# Altium PCB RelayController.PcbDoc
Units mm, origin at the board's own origin, x right, y up, seen from the top; angles counter-clockwise.
Board outline 98.68 x 98.43 mm, 2 copper layers (Top Layer, Bottom Layer); 52 components, 65 nets, 204 pads, 43 vias.
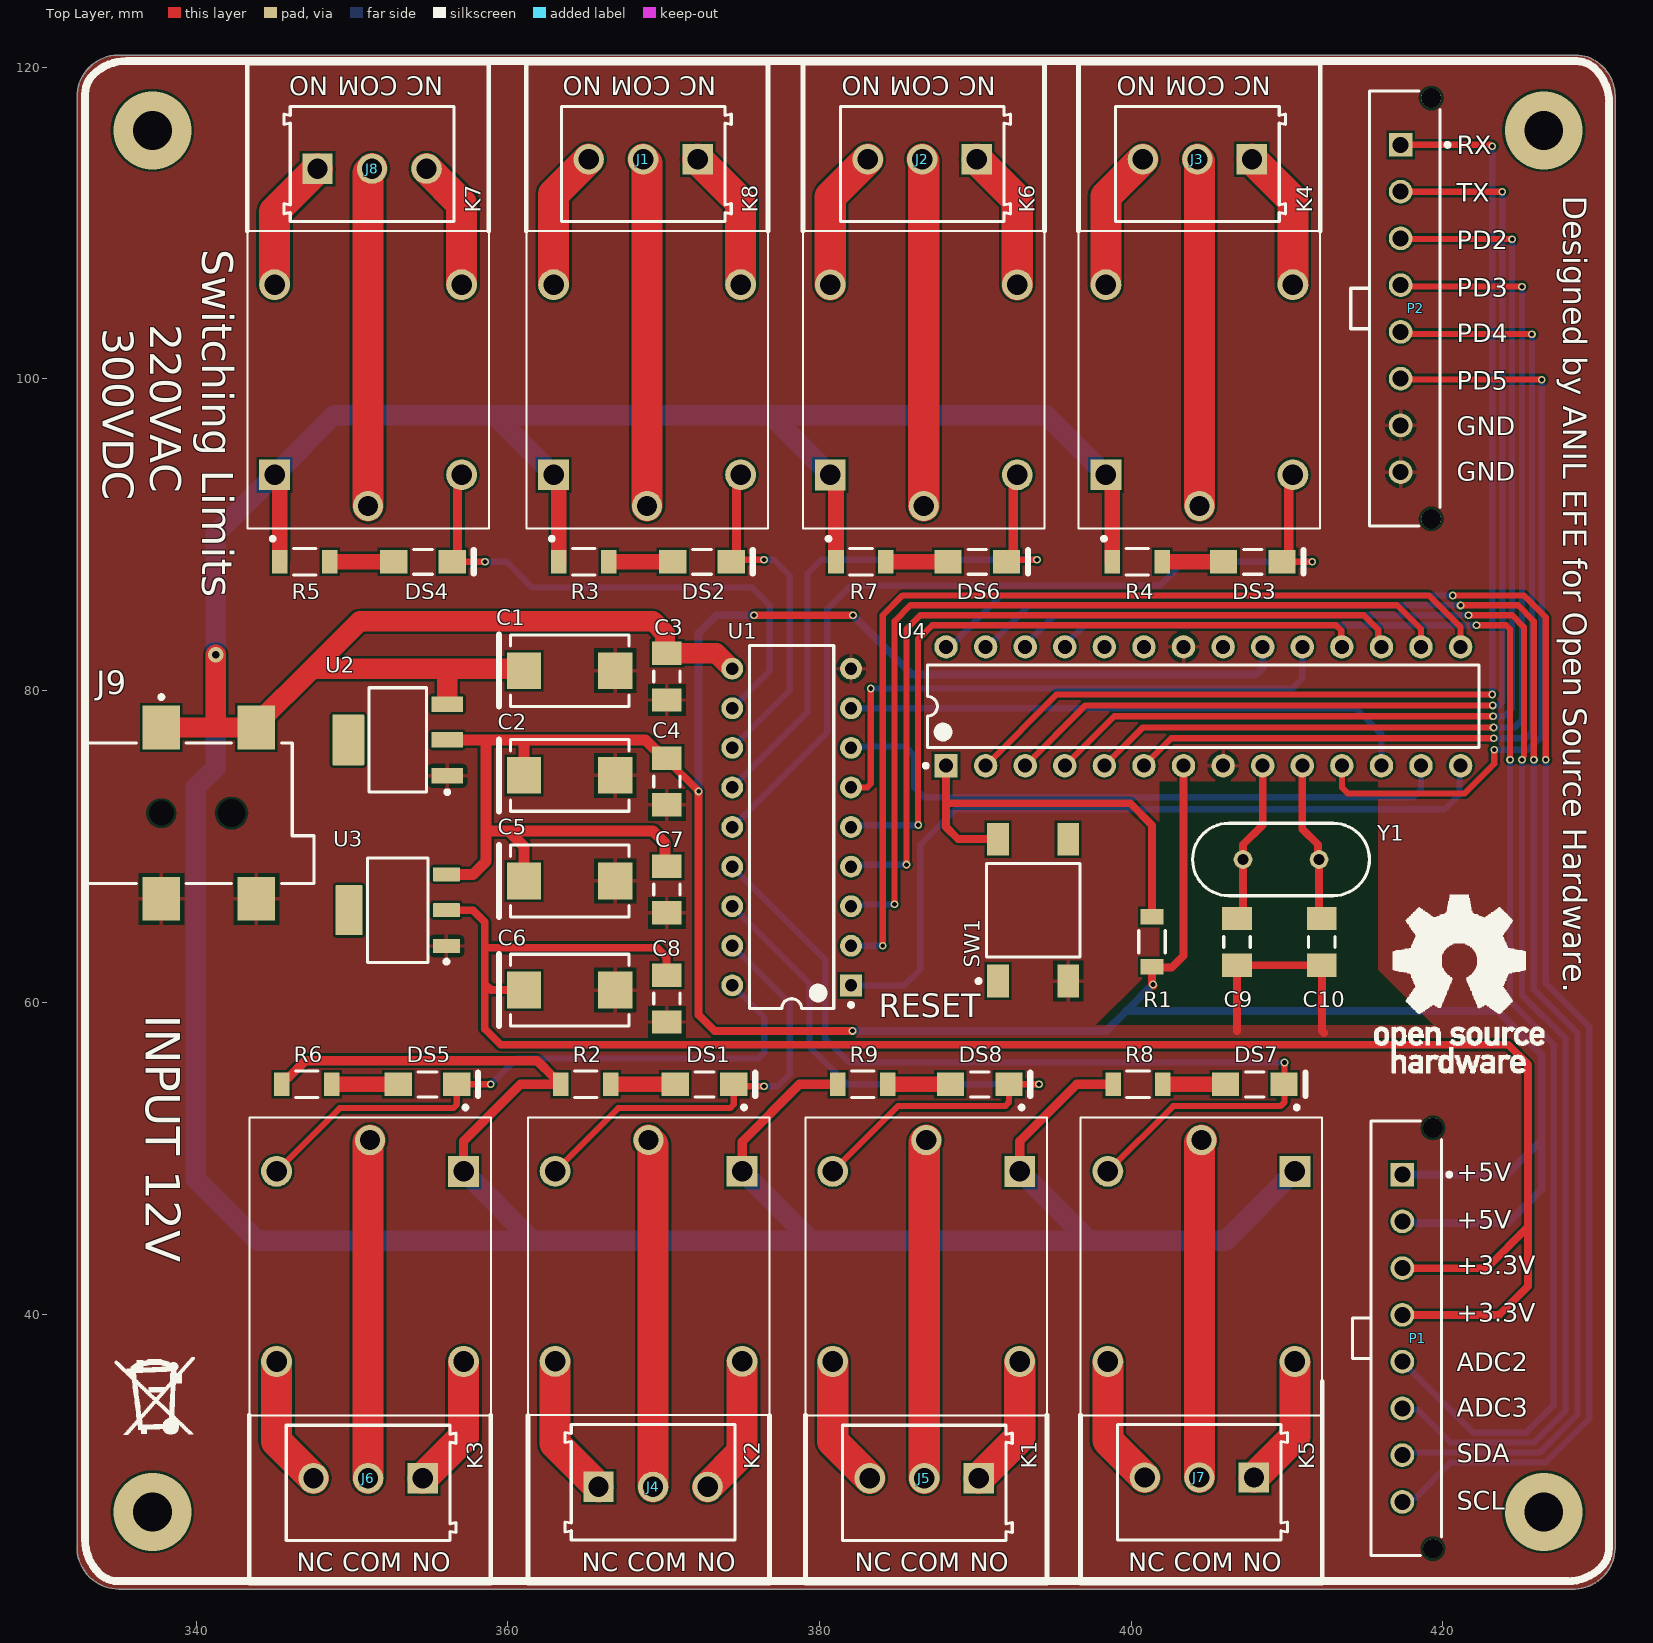
[diagram p0: Top Layer view]
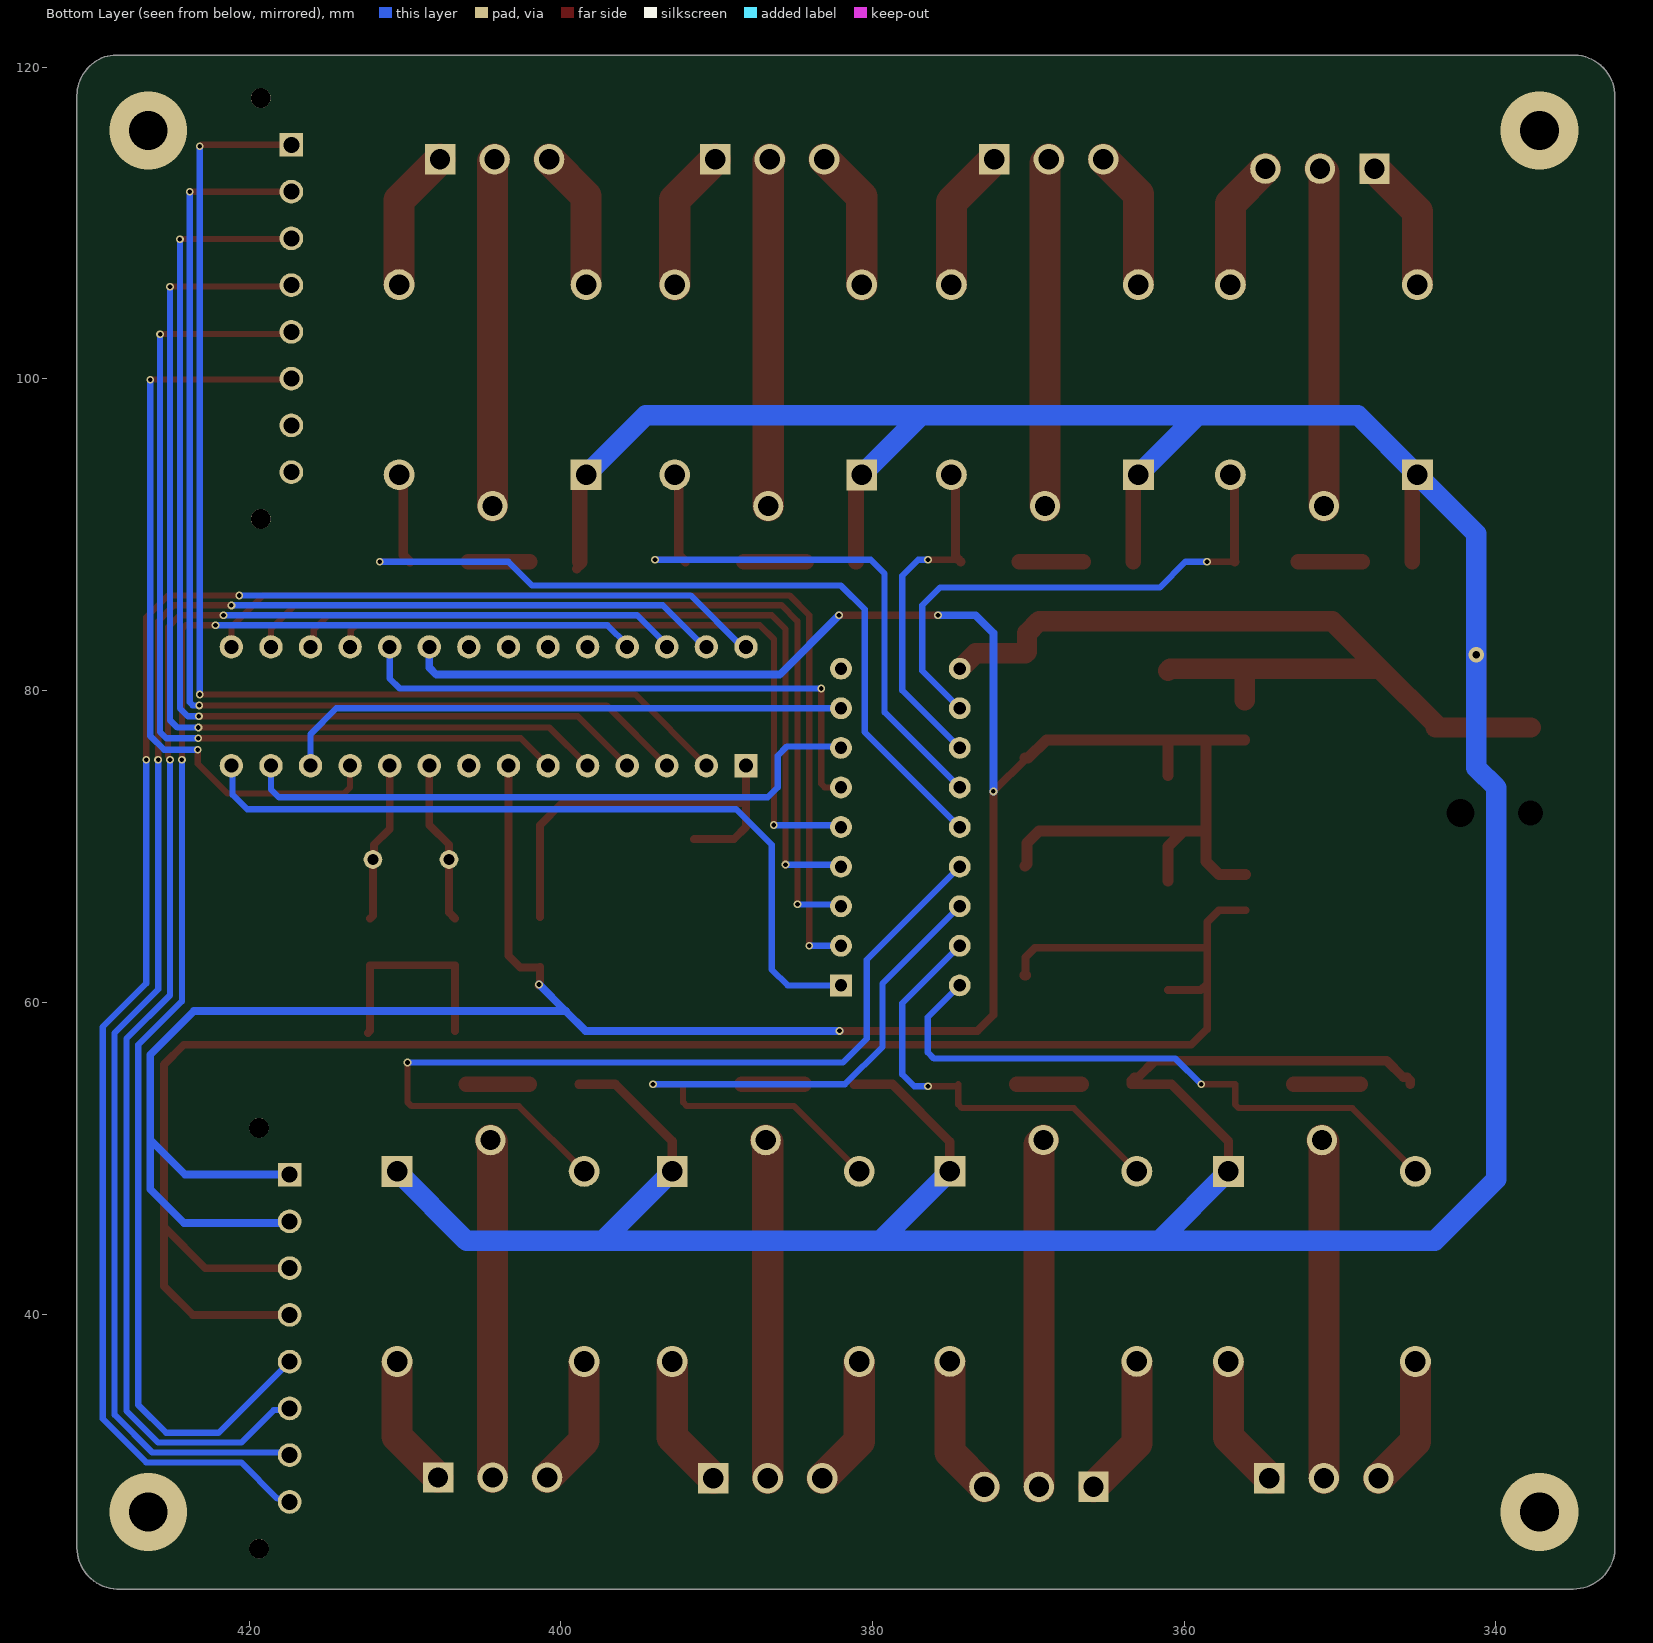
[diagram p1: Bottom Layer view, seen from below]
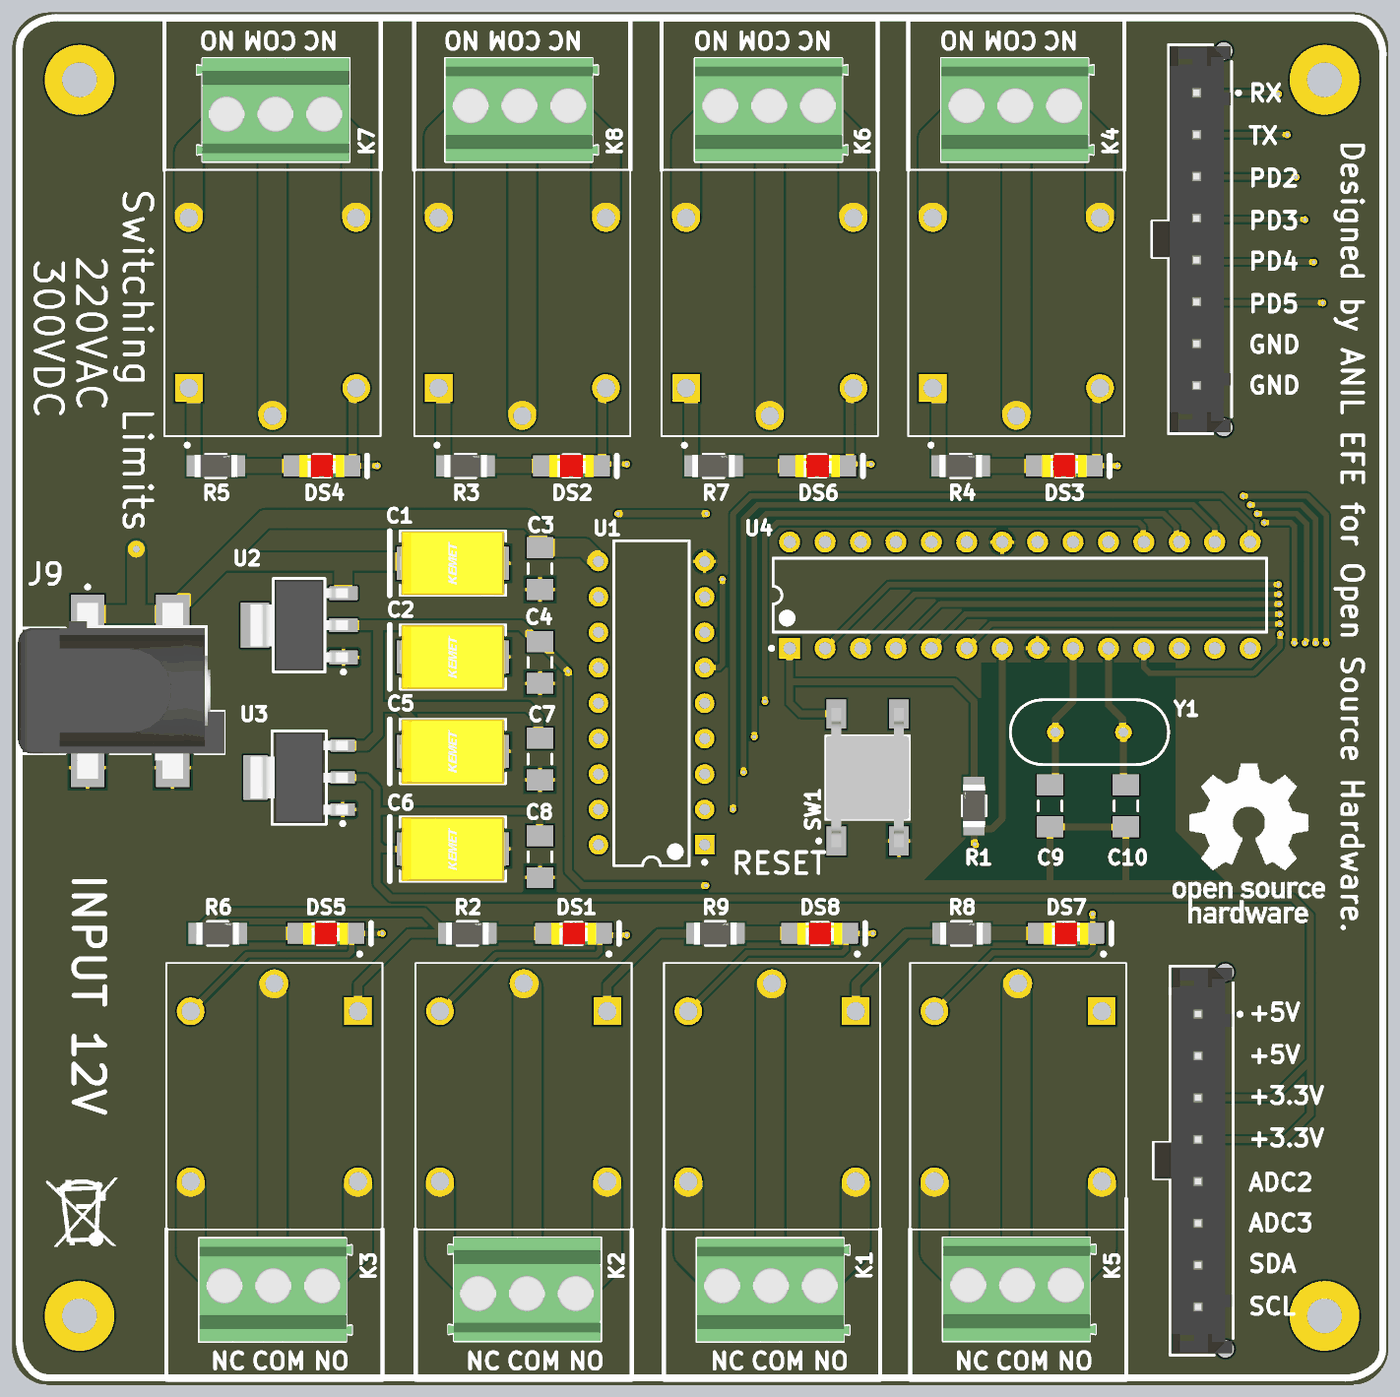
[diagram p2: 3D render of the assembled board from above, using the file's embedded part models]

## Layer stack, top to bottom
Top Solder: solder mask 0.0102, Solder Resist, Dk 3.5
Top Layer: signal copper 0.0356
Dielectric 1: dielectric 0.32, FR-4, Dk 4.8
Bottom Layer: signal copper 0.0356
Bottom Solder: solder mask 0.0102, Solder Resist, Dk 3.5

## Board outline
332.359,25.149 ccw(c335.026,25.022) 335.026,22.352 428.244,22.352 ccw(c428.371,25.016) 431.038,25.016 431.038,118.175 ccw(c428.436,118.175) 430.276,120.015 430.205,120.086 ccw(c428.537,118.418) 428.537,120.777 335.153,120.777 ccw(c335.026,118.11) 332.356,118.11 332.359,118.11

## Design rules (kind name [scope] priority, off if disabled: settings)
Clearance [All] p1: gap=0.15 ignorepadtopadclearanceinfootprint=FALSE
ComponentClearance [All] p1: gap=0 collisioncheckmode=3 verticalgap=0 showdistances=FALSE
PolygonConnect [All] p1: connectstyle=Relief reliefconductorwidth=0.254 reliefentries=4 polygonreliefangle="90 Angle" airgapwidth=0.254
RoutingVias [All] p1: holewidth=0.711 width=1.27 viastyle="Through Hole" minholewidth=0.711 minwidth=1.27 maxholewidth=0.711 maxwidth=1.27
SolderMaskExpansion [All] p1: expansion=0.102 istentingtop=FALSE
Width [All] p1: maxlimit=5 minlimit=0.254 preferedwidth=0.254 minimp=50.000000 maximp=50.000000 favimp=50.000000
29 further rules are at their usual default settings.

## Components (designator, comment, footprint, x,y, rotation, side; value= is the part's Value field where it differs from the comment)
C1 "22uF_TANT" KEMT-T491-D_L 363.958,81.281 r0 top
C2 "22uF_TANT" KEMT-T491-D_L 363.958,74.56 r0 top
C3 "100N" KEMT-1206-2_M 370.205,80.899 r90 top
C4 "100N" KEMT-1206-2_M 370.205,74.168 r90 top
C5 "22uF_TANT" KEMT-T491-D_L 363.958,67.786 r0 top
C6 "22uF_TANT" KEMT-T491-D_L 363.958,60.788 r0 top
C7 "100N" KEMT-1206-2_M 370.205,67.236 r90 top
C8 "100N" KEMT-1206-2_M 370.205,60.238 r90 top
C9 "22pF" KEMT-1206-2_M 406.781,63.881 r90 top
C10 "22pF" KEMT-1206-2_M 412.228,63.881 r90 top
DS1 "GREEN" KING-APTD3216CGCK_V 372.618,54.737 r0 top
DS2 "GREEN" KING-APTD3216CGCK_V 372.461,88.265 r0 top
DS3 "GREEN" KING-APTD3216CGCK_V 407.797,88.265 r0 top
DS4 "GREEN" KING-APTD3216CGCK_V 354.557,88.265 r0 top
DS5 "GREEN" KING-APTD3216CGCK_V 354.838,54.737 r0 top
DS6 "GREEN" KING-APTD3216CGCK_V 390.114,88.265 r0 top
DS7 "GREEN" KING-APTD3216CGCK_V 407.924,54.737 r0 top
DS8 "GREEN" KING-APTD3216CGCK_V 390.271,54.737 r0 top
J1 "691214110003" 691214110003 368.681,113.792 r180 top
J2 "691214110003" 691214110003 386.588,113.792 r180 top
J3 "3POS TERMINAL 3.5MM" 691214110003 404.241,113.792 r180 top
J4 "691214110003" 691214110003 369.316,29.21 r0 top
J5 "691214110003" 691214110003 386.715,29.164 r180 top
J6 "3POS TERMINAL 3.5MM" 691214110003 351.028,29.164 r180 top
J7 "691214110003" 691214110003 404.368,29.21 r180 top
J8 "691214110003" 691214110003 351.282,113.792 r0 top
J9 "BARREL JACK" CUI-PJ-002AH-4_V 340.165,72.136 r0 top
K1 "SRD-05VDC-SL-C" RELAY_SRD-05VDC-SL-C 386.842,43.053 r270 top
K2 "SRD-05VDC-SL-C" RELAY_SRD-05VDC-SL-C 369.031,43.057 r270 top
K3 "SRD-05VDC-SL-C" RELAY_SRD-05VDC-SL-C 351.155,43.053 r270 top
K4 "" RELAY_SRD-05VDC-SL-C 404.368,99.949 r90 top
K5 "SRD-05VDC-SL-C" RELAY_SRD-05VDC-SL-C 404.495,43.053 r270 top
K6 "SRD-05VDC-SL-C" RELAY_SRD-05VDC-SL-C 386.684,99.945 r90 top
K7 "SRD-05VDC-SL-C" RELAY_SRD-05VDC-SL-C 351.028,99.949 r90 top
K8 "SRD-05VDC-SL-C" RELAY_SRD-05VDC-SL-C 368.935,99.949 r90 top
P1 "66200811122" 66200811122 417.649,38.443 r90 top
P2 "66200811122" 66200811122 417.541,104.519 r90 top
R1 "10K" FP-RC1206-MFG 401.331,63.881 r90 top value=0Ω
R2 "820R" FP-RC1206-MFG 364.998,54.737 r0 top value=0Ω
R3 "820R" FP-RC1206-MFG 364.871,88.265 r0 top value=0Ω
R4 "820R" FP-RC1206-MFG 400.38,88.265 r0 top value=0Ω
R5 "820R" FP-RC1206-MFG 346.964,88.265 r0 top value=0Ω
R6 "820R" FP-RC1206-MFG 347.091,54.737 r0 top value=0Ω
R7 "820R" FP-RC1206-MFG 382.651,88.265 r0 top value=0Ω
R8 "820R" FP-RC1206-MFG 400.431,54.737 r0 top value=0Ω
R9 "820R" FP-RC1206-MFG 382.778,54.737 r0 top value=0Ω
SW1 "BUTTON" TECO-FSM4JSMATR_V 393.7,65.913 r180 top
U1 "ULN2803A" STM-DIP-18 378.206,71.247 r180 top
U2 "LM1117-5.0" DCY0004A_M 352.933,76.835 r180 top
U3 "LM1117IMP-3.3" DCY0004A_N 352.933,65.913 r180 top
U4 "ATmega328P-PU" 28P3 404.622,78.994 r90 top
Y1 "16MHZ" FOX-FOXSLF-2_V 409.609,69.165 r0 top

## Footprints (in the part's own frame and the unit in brackets; to place one, negate y for a bottom-side part, rotate by r counter-clockwise, add the part's x,y. Pads: shape width x height; smd on the part's side, far side on the other; paste and mask are expansions set on the pad)
28P3 [mm] "28-Pin Plastic Dual In-Line Package (PDIP)"
  rect 1.5x1.5 hole 0.9: 1(-3.81,16.51)
  round 1.5 hole 0.9: 2(-3.81,13.97) 3(-3.81,11.43) 4(-3.81,8.89) 5(-3.81,6.35) 6(-3.81,3.81) 7(-3.81,1.27) 8(-3.81,-1.27) 9(-3.81,-3.81) 10(-3.81,-6.35) 11(-3.81,-8.89) 12(-3.81,-11.43) 13(-3.81,-13.97) 14(-3.81,-16.51) 15(3.81,-16.51) 16(3.81,-13.97) 17(3.81,-11.43) 18(3.81,-8.89) 19(3.81,-6.35) 20(3.81,-3.81) 21(3.81,-1.27) 22(3.81,1.27) 23(3.81,3.81) 24(3.81,6.35) 25(3.81,8.89) 26(3.81,11.43) 27(3.81,13.97) 28(3.81,16.51)
  silkscreen extent -3.93,-17.7 2.65,17.93, body extent -3.6,-17.65 3.6,17.65, height 4.58
66200811122 [mm] "3.00mm Male Single Row Vertical Header, 8p"
  rect 1.52x1.52 hole 1.02: 1(10.5,0.255)
  round 1.52 hole 1.02: 2(7.5,0.255) 3(4.5,0.255) 4(1.5,0.255) 5(-1.5,0.255) 6(-4.5,0.255) 7(-7.5,0.255) 8(-10.5,0.255)
  round 1.27 hole 1.27 unplated: MH1(-13.5,-1.705) MH2(13.5,-1.705)
  silkscreen extent -13.95,-2.88 13.95,3.46, body extent -13.82,-2.19 13.83,3.38, height 9.93
691214110003 [mm] "3.50 mm Horizontal Entry Modular, 3p"
  rect 1.95x1.95 hole 1.3: 1(-3.5,-0.3)
  round 1.95 hole 1.3: 2(0,-0.3) 3(3.5,-0.3)
  silkscreen extent -5.65,-3.7 5.25,3.7, body extent -5.7,-3.7 5.25,3.7, height 8.55
CUI-PJ-002AH-4_V [mm] "SMD, 4-Leads, Body 14.8x9 mm, Pitch 6.1mm"
  rect 2.4x2.8 smd: 1(-2.4,5.5) 1(3.7,5.5) 2(-2.4,-5.5) 3(3.7,-5.5)
  round 0 hole 1.6: MH1(-2.4,0)
  round 0 hole 1.8: MH2(2.1,0)
  silkscreen extent -7.4,-4.5 7.4,7.57, body extent -7.4,-6.3 7.4,6.3, height 11.2
DCY0004A_M [mm] "SOT223, 4-Leads, Body 6.7x3.7mm, Pitch 2.3mm, IPC Low Density"
  rrect10% 2.05x1 smd: 1(-3.175,2.3) 2(-3.175,0) 3(-3.175,-2.3)
  rrect5% 2.05x3.25 smd: 4(3.175,0)
  silkscreen extent -3.3,-3.35 1.85,3.47, body extent -3.5,-3.25 3.5,3.25, height 1.62
DCY0004A_N [mm] "SOT223, 4-Leads, Body 6.7x3.7mm, Pitch 2.3mm, IPC Medium Density"
  rrect11% 1.75x0.9 smd: 1(-3.125,2.3) 2(-3.125,0) 3(-3.125,-2.3)
  rrect6% 1.75x3.2 smd: 4(3.125,0)
  silkscreen extent -3.25,-3.35 1.95,3.42, body extent -3.5,-3.25 3.5,3.25, height 1.62
FOX-FOXSLF-2_V [mm] "THD, 2-Leads, Body 11.35x4.65mm, Pitch 4.88mm"
  round 1.2 hole 0.7: 1(-2.44,0) 2(2.44,0)
  silkscreen extent -5.68,-2.32 5.68,2.32, body extent -5.67,-2.32 5.68,2.32, height 3.6
FP-RC1206-MFG [mm]
  rect 1x1.5 smd paste+0 mask+0: 1(-1.6,0) 2(1.6,0)
  silkscreen extent -0.72,-0.85 0.72,0.85, body extent -2.2,-0.95 2.2,0.95, height 0.25
KEMT-1206-2_M [mm] "SMD, 2-Leads, Body 3.4x1.8mm, IPC Low Density"
  rect 1.5x1.9 smd: 1(-1.5,0) 2(1.5,0)
  silkscreen extent -0.35,-0.85 0.35,0.85, body extent -1.7,-0.9 1.7,0.9, height 0.88
KEMT-T491-D_L [mm] "Molded Capacitor, 2-Leads, Body 7.60x4.60mm, IPC High Density"
  rect 2.2x2.35 smd: 1(-2.925,0) 2(2.925,0)
  silkscreen extent -4.52,-2.3 3.8,2.3, body extent -3.8,-2.3 3.8,2.3, height 3.1
KING-APTD3216CGCK_V [mm] "SMD, 2-Leads, Body 3.2x1.6mm"
  rect 1.75x1.5 smd: 1(-1.875,0) 2(1.875,0)
  silkscreen extent -0.6,-0.8 3.25,0.8, body extent -1.6,-0.8 1.6,0.8, height 1.8
RELAY_SRD-05VDC-SL-C [mm]
  rect 1.98x1.98 hole 1.32: A1(-6.1,6)
  round 1.98 hole 1.32: A2(-6.1,-6) NC(6.1,6) NO(6.1,-6)
  round 1.935 hole 1.29: COM(-8.1,0)
  silkscreen extent -10.3,-7.75 9.55,7.75
STM-DIP-18 [mm] "DIP, 18-Leads, Body 23.25x7.1mm, Pitch 2.54mm"
  rect 1.4x1.4 hole 0.8: 1(-3.81,10.16)
  round 1.4 hole 0.8: 2(-3.81,7.62) 3(-3.81,5.08) 4(-3.81,2.54) 5(-3.81,0) 6(-3.81,-2.54) 7(-3.81,-5.08) 8(-3.81,-7.62) 9(-3.81,-10.16) 10(3.81,-10.16) 11(3.81,-7.62) 12(3.81,-5.08) 13(3.81,-2.54) 14(3.81,0) 15(3.81,2.54) 16(3.81,5.08) 17(3.81,7.62) 18(3.81,10.16)
  silkscreen extent -3.94,-11.65 2.7,11.65, body extent -3.93,-11.63 3.93,11.63, height 3.93
TECO-FSM4JSMATR_V [mm] "SMD, 4-Leads, Body 6x6mm, Pitch 4.5mm"
  rect 1.4x2.1 smd: 1(2.25,4.55) 2(2.25,-4.55) 3(-2.25,4.55) 4(-2.25,-4.55)
  silkscreen extent -3,-3 3.62,4.67, body extent -3,-5 3,5, height 5.08

## Part data
C1 C2 C5 C6: library part CMP-2000-07201-1, "Tantalum Surface Mount Capacitor, 22 uF, +/- 10%, 16 V, -55 to 125 degC, 2-Pin SMD, RoHS, Tape and Reel", Capacitance=22µF, Capacitance Tolerance=±10%, Capacitor Case Style=2917, Capacitor Terminals=SMD, Manufacturer=Kemet, Operating Temperature Range=-55°Cto+125°C, Package Description="2-Pin Surface Mount Device, Body 7.3 x 4.3 mm", Package Reference=T491-D, Voltage Rating=16V, Datasheet URL=http://www.kemet.com/Lists/ProductCatalog/Attachments/254/KEM_T2005_T491.pdf, Datasheet Version=06/2016, ESR=0.8ohm, Lead Spacing=–, Manufacturer URL=http://www.kemet.com/, Mounting Technology=SurfaceMount, MSL=MSL1-Unlimited, SVHC=–
C3 C4 C7 C8 C9 C10: library part CMP-2000-05169-1, "CAP, Ceramic, 0.1 uF, +/- 10%, 50 V, -55 to 125 degC, 1206 (3216 Metric), RoHS, Tape and Reel", Capacitance=0.1µF, Capacitance Tolerance=±10%, Capacitor Case Style=1206[3216Metric], Dielectric Characteristic=X7R, Manufacturer=Kemet, Operating Temperature Max=125degC, Operating Temperature Min=-55degC, Package Description="2-Leads SMD, Body 3.2 x 1.6 mm", Package Reference=1206-2, Voltage Rating=50V, Datasheet URL=https://datasheet.ciiva.com/6125/1725438-6125494.pdf, Datasheet Version=Jul-13, Manufacturer URL=http://www.kemet.com/, Packaging=Tape&Reel, Product Range=KEMET-CSeries, SVHC=ToBeAdvised
DS1 DS2 DS3 DS4 DS5 DS6 DS7 DS8: library part CMP-2000-05792-1, "Chip LED Lamp, Green, 5 V, 30 mA, -40 to 85 degC, 2-Pin SMD, RoHS, Tape and Reel", Color=Green, Current - Test=20mA, Manufacturer=Kingbright, Millicandela Rating=300mcd, Package / Case=1206(3216Metric), Package Description="2-Pin Surface Mount Device, Body 3.2 x 1.6 mm", Package Reference=APTD3216CGCK, Standard Package=2,000, Voltage - Forward (Vf) (Typ)=2.1V, 3D Model="APTD3216x.sldprt /  / APTD3216x.pro /  / APTD3216x.igs /  / APTD3216x.stp", Catalog Drawings="APTD3216SeriesTop /  / APTD3216SeriesSide", Category=Optoelectronics, Datasheet URL=https://www.kingbrightusa.com/images/catalog/spec/APTD3216CGCK.pdf, Datasheet Version="Rev. V.17B, 04/2015", Family=LEDIndication-Discrete, Height=1.80mm, Lens Style/Size=RoundwithDomedTop,1.6mm, Lens Type=Clear, Manufacturer URL=http://www.kingbright.com/, Mounting Technology=SurfaceMount, Mounting Type=SurfaceMount, Online Catalog=3.2mmx1.6mmRoundwithDomedTop1206PackageLEDs, Other Names=754-1152-2, Packaging=Tape&Reel(TR), Size / Dimension=3.20mmLx1.60mmW, Viewing Angle=50°, Wavelength - Dominant=570nm, Wavelength - Peak=574nm
J1 J2 J4 J5 J7 J8: library part CMP-1502-02466-1, "Serie 2141 - 3.50 mm Horizontal Entry Modular with Rising Cage Clamp WR-TBL, 3 pin", Manufacturer="Wurth Elektronik", Operating Temperature=-40to105degC, Datasheet URL=http://katalog.we-online.de/em/datasheet/6912141100xx.pdf, Manufacturer URL=http://www.we-online.de, Mounting Technology=THT, Package Reference=691214110003, Packaging=Box, Part Number=691214110003, Pin Number=3, Pitch=3.50mm, Publisher=WurthElektronik
J3 J6: library part CMP-1502-02466-1, "Serie 2141 - 3.50 mm Horizontal Entry Modular with Rising Cage Clamp WR-TBL, 3 pin", Manufacturer="Wurth Elektronik", Operating Temperature=-40to105degC, Package Reference=691214110003, Datasheet URL=http://katalog.we-online.de/em/datasheet/6912141100xx.pdf, Manufacturer URL=http://www.we-online.de, Mounting Technology=THT, Packaging=Box, Part Number=691214110003, Pin Number=3, Pitch=3.50mm, Publisher=WurthElektronik
J9: library part CMP-2000-06896-1, "DC Power Jack, Right Angle, -25 to 85 degC, 4-Pin 14.8 x 9 x 11 mm SMD, RoHS, Tape and Reel", Current Rating=5A, Flammability Rating=UL94V-0, Manufacturer=CUIInc., Operating Temperature Range=-25Cto+85C, Package Description="4-Pin Surface Mount Device, Body 14.8 x 9 mm, Pitch 6.1 mm", Package Reference=PJ-002AH, Voltage Rating=24V, Insulation Resistance=100MOhms, Brand=CUI, Connector Type=DCPowerJack, Contact Gender=Male, Contact Material=Brass, Contact Plating=Nickel, Datasheet URL=http://www.cui.com/product/resource/pj-002ah-smt.pdf, Datasheet Version="Rev. 1.03, 11/2012", Factory Pack Quantity=350, Housing Material=Polyamide(PA), Manufacturer URL=http://www.cui.com/, Mounting Angle=Right, Mounting Style=SMD/SMT, Mounting Technology=SurfaceMount, Outside Contact Diameter=6.5mm, Packaging=Reel, PartNumber=PJ-002AH, Product=Jacks, Product Category=DCPowerConnectors, RoHS=True, Termination Style=SMD/SMT, Inside Contact Diameter=2mm
K1 K2 K3 K5 K6 K7 K8: "5V Trigger Relay Module For Arduino And Raspberry Pi 5V Trigger Relay Module For Arduino And Raspberry Pi", Package=None, Availability=Unavailable, MF="Songle Relay", MP=SRD-05VDC-SL-C, Price=None, SnapEDA_Link=https://www.snapeda.com/parts/SRD-05VDC-SL-C/Songle%20Relay/view-part/1029484/?ref=snap
K4: library part SRD-05VDC-SL-C, "5V Trigger Relay Module For Arduino And Raspberry Pi 5V Trigger Relay Module For Arduino And Raspberry Pi", Package=None, Availability=Unavailable, MF="Songle Relay", MP=SRD-05VDC-SL-C, Price=None, SnapEDA_Link=https://www.snapeda.com/parts/SRD-05VDC-SL-C/Songle%20Relay/view-part/1029484/?ref=snap
P1 P2: library part CMP-1502-00446-1, "THT Male Header WR-MPC3, Vertical, Single Row, pitch 3 mm, 8 pins", Contact Resistance=10mOhm, Manufacturer="Wurth Elektronik", Operating Temperature=-40to105degC, Working Voltage=250VAC, Datasheet URL=https://katalog.we-online.de/em/datasheet/6620xx11122.pdf, Gender=Male, Manufacturer URL=http://www.we-online.de, Mounting Technology=THT, Orientation=Vertical, Package Reference=66200811122, Packaging=Tube, Part Number=66200811122, Pin Number=8, Pitch=3mm, Publisher=WurthElektronik
R1 R2 R3 R4 R5 R6 R7 R8 R9: library part CMP-03412-007570-1, "RES SMD 0 OHM JUMPER 1/4W 1206", Manufacturer=YAGEO, Manufacturer Part Number=RC1206JR-070RL, Package=RC1206, Power Rating=0.25W, Resistance=0Ω, Temperature="-55°C to +155°C", Temperature Coefficient=300ppm/°C, Temperature Range High=+155°C, Temperature Range Low=-55°C, Tolerance=5%, Voltage Rating=200V, Automotive=No, Category=Res, ComponentLink2Description=Datasheet, ComponentLink2URL=https://www.yageo.com/upload/media/product/productsearch/datasheet/rchip/PYu-RC_Group_51_RoHS_L_10.pdf, Composition="Thick Film", Device Class L1="Passive Components", Device Class L2=Resistors, Device Class L3="Chip SMD Resistors", Digikey Description="RES SMD 0 OHM JUMPER 1/4W 1206", Footprint Url=https://www.yageo.com/upload/website/yageo_PYu-R_Mount_10_19050818_343.pdf, Height=0.65mm, Lead Free=Yes, Mouser Description="Resistor: thick film; SMD; 1206; 0O; 0.25W; ±5%; -55÷155°C", Octopart=https://octopart.com/rc1206jr-070rl-yageo-40025601, RoHS=TRUE, Series=RC, Ipc Land Pattern Name=RESC310160X55
SW1: library part CMP-2000-07486-1, "Micro Miniature Push Button Switch FSM JSM, 50 mA, -35 to 85 degC, 4-Pin SMD, RoHS, Tape and Reel", Capacitance=0f, Case\/Package=SMD/SMT, Contact Current Rating=50mA, Contact Resistance=100mOhm, Manufacturer="TE Connectivity", Max Operating Temperature=85degC, Max Voltage Rating (DC)=12V, Min Operating Temperature=-35degC, Operating Force=160gf, Package Description="4-Pin Surface Mount Device, Body 6 x 6 mm, Pitch 4.5 mm", Package Quantity=1200, Package Reference=FSM4JSMATR, Voltage Rating (DC)=24V, Actuator Length=0.055inch, Actuator Material=Polyamide, Contact Material=CopperAlloy, Contact Plating=Silver, Current Rating=50mA, Datasheet URL=http://www.te.com/commerce/DocumentDelivery/DDEController?Action=showdoc&DocId=Customer+Drawing%7F2-1437565-7%7FV%7Fpdf%7FEnglish%7FENG_CD_2-1437565-7_V.pdf%7F4-1437565-2, Datasheet Version="Rev. V, 02/2015", Electrical Life=100000Cycles, Manufacturer URL=http://www.te.com/, Mechanical Life=100000Cycles, Mount=SurfaceMount, Mounting Technology=SurfaceMount, Orientation=Straight, Packaging=TapeandReel, REACH SVHC=Unknown, RoHSCompliant=true, Switch Travel=0.25mm, Termination=GullWing, Throw Configuration=SPST, Illumination Type=Illuminated
U1: library part CMP-2000-05363-1, "Eight Darlington Arrays, 50 V, 2.25 W, 500 mA, 18-Pin DIP, RoHS, Tube", Collector Emitter Voltage V(br)ceo=50V, DC Collector Current=500mA, DC Current Gain hFE=1000hFE, Manufacturer=STMicroelectronics, Operating Temperature Max=85degC, Package Description="18-Pin Double In-line Package, Body 24.8 x 7.1 mm, Pitch 2.54 mm", Package Reference=DIP-18, Power Dissipation Pd=2.25W, Transistor Case Style=DIP, Automotive Qualification Standard=-, Datasheet URL=https://datasheet.ciiva.com/29306/171824-da-01-en-ic-uln2803-dil18-29306026.pdf, Datasheet Version=Sep-03, Manufacturer URL=http://www.st.com/, MSL=-, No. of Pins=18Pins, Product Range=-, SVHC=NoSVHC(17-Dec-2015), Transistor Polarity=NPN
U2: library part CMP-0062-01627-4, "800mA Low-Dropout Linear Regulator, 4-pin SOT-223, Pb-Free", Manufacturer="Texas Instruments", PackageTopMarking=XYTT*N06B, PartNumber=LM1117IMP-5.0/NOPB, PowerWise=N, Code_JEDEC=TO-261-AA, Code_IPC=SOT223-4, ComponentLink1Description="Datasheet URL", ComponentLink1URL=http://www.ti.com/general/docs/lit/getliterature.tsp?genericPartNumber=LM1117-N&fileType=pdf, CompType="LDO IC", High-Reliability=Y, PackageDescription="Molded SOT-223, 6.50 x 3.56 x 1.6mm Body, 4 Lead, 2.3mm Pitch", PackageReference=DCY0004A, PinCount=4, RoHS=Y
U3: library part CMP-0062-01631-4, "800mA Low-Dropout Linear Regulator, 4-pin SOT-223, Pb-Free", Manufacturer="Texas Instruments", PackageTopMarking=XYTT*N05B, PartNumber=LM1117IMP-3.3/NOPB, PowerWise=N, Code_JEDEC=TO-261-AA, Code_IPC=SOT223-4, ComponentLink1Description="Datasheet URL", ComponentLink1URL=http://www.ti.com/general/docs/lit/getliterature.tsp?genericPartNumber=LM1117-N&fileType=pdf, CompType="LDO IC", High-Reliability=Y, PackageDescription="Molded SOT-223, 6.50 x 3.56 x 1.6mm Body, 4 Lead, 2.3mm Pitch", PackageReference=DCY0004A, PinCount=4, RoHS=Y
U4: library part CMP-0095-00013-2, "8-bit AVR Microcontroller, 32KB Flash, 1KB EEPROM, 2KB SRAM, 28-pin PDIP, Industrial Grade (-40°C to 85°C)", ComponentLink1Description="Manufacturer URL", ComponentLink1URL=http://www.atmel.com/, ComponentLink2Description="ATmega48A/48PA/88A/88PA/168A/168PA/328/328P Datasheet", ComponentLink2URL=http://www.atmel.com/dyn/resources/prod_documents/8271.pdf, ComponentLink3Description="ATmega48A/48PA/88A/88PA/168A/168PA/328/328P Summary", ComponentLink3URL=http://www.atmel.com/dyn/resources/prod_documents/8271S.pdf, DatasheetVersion="revD, May-2011", PackageDescription="28-lead (0.300\"/7.62mm Wide) Plastic Dual Inline Package (PDIP)", PackageReference=28P3, PackageVersion="revB, Sep-2001", RevisionNote="DatasheetVersion updated. URLs added."
Y1: library part CMP-1749-00004-1, "Resistance Weld Thru-Hole Crystal, 12 MHz, +/-30 ppm, -20 to 70 degC, 2-Pin THD, RoHS, Bulk", Case\Package=TO-251-3, Max Operating Temperature="150 degC", Max Power Dissipation="2.5 W", Min Operating Temperature="-55 degC", Package Quantity=70, Input Capacitance="350 pF", ComponentLink1Description="Manufacturer URL", ComponentLink1URL=http://www.foxonline.com/, ComponentLink2Description=Datasheet, ComponentLink2URL=http://www.foxonline.com/pdfs/hc49slf.pdf, DatasheetVersion=Mar-15, Elements=1, Height="6.1 mm", Length="6.6 mm", Mount="Through Hole", PackageDescription="2-Pin Through Hole Device, Body 11.35 x 4.65 mm, Pitch 4.88 mm", PackageReference=FOXSLF-2, Packaging=Rail/Tube, Pins=3, Radiation Hardening=No, Rds On Max="115 mohm", REACH SVHC="No SVHC", RoHSCompliant=true, Typical Rise Time="90 ns", Width="2.3 mm"

## Via types
v1: diameter 0.5, hole 0.3, Top Layer to Bottom Layer, 38 vias
v2: diameter 5, hole 2.5, Top Layer to Bottom Layer, 4 vias
v3: diameter 1, hole 0.5, Top Layer to Bottom Layer, 1 vias

## Nets (pads, with @x,y where several pads share a name; then routed paths per layer and width w, separated by ;. In a path a pad name is that pad's centre, name@x,y a point inside that pad or via, vN(x,y) a via of type N, cw(c..) or ccw(c..) an arc to the next point about the centre after c; other vN are vias at no path point)
+3.3V: C6.1 C8.2 P1.3 P1.4 U3.2 | length 125.5
  Top Layer w0.5: U3.2 357.759,65.913 358.521,65.151 358.521,63.5 ; C6.1 358.931,60.788 358.521,61.198 ; C8.2@370.172,61.738 370.172,62.898 369.57,63.5 358.521,63.5 ; P1.4 423.61,39.943 425.45,41.783 425.45,45.593 ; P1.3 422.8,42.943 425.45,45.593 ; 358.521,61.198 358.521,58.293 359.537,57.277 424.18,57.277 425.45,56.007 425.45,45.593 ; 358.521,61.198 358.521,63.5
  Top Layer w0.7: C8.2@370.172,61.738 C8.2
+5V: C2.1 C4.2 C5.1 C7.2 P1.1 P1.2 R1.1 U2.2 U3.3 U4.7 U4.20 | length 214.6
  Top Layer w0.5: C4.2@370.105,75.668 v1(372.237,73.536) 372.237,59.182 373.253,58.166 v1(382.107,58.166) ; v1(375.793,84.836) v1(382.143,84.836) ; v1@401.447,61.087 401.329,61.205 401.329,62.278 401.377,62.23 402.59,62.23 403.352,62.992 U4.7
  Top Layer w0.7: U3.3 U3.3@356.368,68.213 ; U2.2 358.584,76.835 ; U3.3@356.382,68.199 357.759,68.199 358.584,69.025 358.584,70.993 ; C5.1 361.033,70.005 360.045,70.993 ; C2.1 361.033,76.807 361.061,76.835 ; C7.2 370.078,68.863 370.078,70.231 369.316,70.993 360.045,70.993 ; C4.2 370.105,75.668 370.005,75.668 368.838,76.835 361.061,76.835 ; 358.584,70.993 358.584,76.835 ; 358.584,70.993 360.045,70.993 ; 358.584,76.835 361.061,76.835
  Bottom Layer w0.5: v1(372.237,73.536) 372.237,83.693 373.38,84.836 v1(375.793,84.836) ; v1(382.107,58.166) 398.408,58.166 399.678,59.436 ; v1(382.143,84.836) 385.953,81.026 407.975,81.026 408.432,81.483 U4.20 ; 399.669,59.436 399.678,59.436 ; v1(401.388,61.146) 399.678,59.436 ; P1.2 417.49,45.847 424.18,45.847 426.339,48.006 426.339,51.181 ; P1.1 424.101,48.943 426.339,51.181 ; 399.678,59.436 423.545,59.436 426.339,56.642 426.339,51.181
+12V: C1.1 C3.2 J9.1 K1.A1 K2.A1 K3.A1 K4.A1 K5.A1 K6.A1 K7.A1 K8.A1 R2.1 R3.1 R4.1 R5.1 R6.1 R7.1 R8.1 R9.1 U1.10 U2.3 | length 341.4
  Top Layer w0.6: R6.1 345.491,54.987 345.691,55.187 345.941,55.187 347.015,56.261 361.874,56.261 362.948,55.187 363.198,55.187 363.398,54.987 R2.1 360.807,54.737 357.155,51.085 K3.A1 ; K2.A1 375.031,51.054 378.714,54.737 R9.1 ; K1.A1 392.842,51.085 396.494,54.737 R8.1 ; R4.1 398.78,88.015 R4.1@398.98,87.815
  Top Layer w1: K7.A1 345.364,93.513 R5.1 ; K3.A1 K3.A1@357.251,49.249 ; K8.A1 363.271,93.513 R3.1 ; K6.A1 381.051,93.478 R7.1 ; K1.A1 K1.A1@392.938,49.249 ; K4.A1 398.78,93.437 R4.1
  Top Layer w1.3: J9.1@337.765,77.636 341.249,77.636 ; v3(341.249,82.296) 341.249,77.636 ; K7.A1@344.932,93.753 K7.A1 ; U2.3@356.108,79.375 356.108,81.28 355.981,81.407 ; C1.1 360.907,81.407 355.981,81.407 ; U1.10 374.369,81.407 373.377,82.399 C3.2 370.178,82.399 370.078,82.499 370.078,83.693 369.316,84.455 350.484,84.455 347.436,81.407 ; 341.249,77.636 343.865,77.636 343.865,77.836 347.436,81.407 ; 347.436,81.407 355.981,81.407
  Bottom Layer w1.3: K3.A1 361.604,44.704 ; K8.A1 359.121,97.663 ; K2.A1 379.484,44.704 ; K6.A1 376.866,97.663 ; K1.A1 397.291,44.704 ; K4.A1 394.554,97.663 376.866,97.663 ; K5.A1 406.046,44.704 397.291,44.704 ; 359.121,97.663 376.866,97.663 ; 359.121,97.663 348.842,97.663 K7.A1 341.249,90.07 v3(341.249,82.296) 341.249,75.057 339.979,73.787 339.979,48.641 343.916,44.704 361.604,44.704 ; 361.604,44.704 379.484,44.704 ; 379.484,44.704 397.291,44.704
COM1: J4.2 K2.COM | length 22.4
  Top Layer w2: K2.COM 369.316,50.872 J4.2
COM2: J3.2 K4.COM | length 22.3
  Top Layer w2: J3.2 404.368,113.965 K4.COM
COM3: J2.2 K6.COM | length 22.3
  Top Layer w2: J2.2 386.684,113.996 K6.COM
COM4: J1.2 K8.COM | length 22.3
  Top Layer w2: J1.2 368.935,113.838 K8.COM
COM5: J8.2 K7.COM | length 21.7
  Top Layer w2: K7.COM 351.028,113.238 J8.2
COM6: J7.2 K5.COM | length 21.7
  Top Layer w2: J7.2 404.368,51.026 K5.COM
COM7: J6.2 K3.COM | length 21.7
  Top Layer w2: J6.2 351.028,51.026 K3.COM
COM8: J5.2 K1.COM | length 21.7
  Top Layer w2: J5.2 386.715,51.026 K1.COM
GND: C1.2 C2.2 C3.1 C4.1 C5.2 C6.2 C7.1 C8.1 C9.1 C10.1 J9.2 J9.3 P2.7 P2.8 SW1.3 U1.9 U2.1 U3.1 U4.8 U4.22 | length 14.1
  Top Layer w0.5: 406.781,58.166 C9.1 C10.1 412.228,58.18 412.369,58.039
I1: U1.1 U4.14 | length 50.7
  Bottom Layer w0.4: U1.1 385.445,61.087 386.461,62.103 386.461,70.104 388.747,72.39 420.116,72.39 421.052,73.326 421.052,75.104 U4.14
I2: U1.2 U4.15 | length 63
  Top Layer w0.4: v1(384.048,63.627) 384.048,84.836 385.318,86.106 419.1,86.106 421.132,84.074 U4.15
  Bottom Layer w0.4: U1.2 v1(384.048,63.627)
I3: U1.3 U4.16 | length 57
  Top Layer w0.4: v1@384.81,66.275 v1(384.81,66.294) 384.81,84.455 385.826,85.471 417.068,85.471 418.592,83.947 U4.16
  Bottom Layer w0.4: U1.3 382.124,66.275 384.791,66.275 v1(384.81,66.294)
I4: U1.4 U4.17 | length 51
  Top Layer w0.4: v1@385.572,68.766 v1(385.572,68.834) 385.572,83.947 386.461,84.836 414.909,84.836 415.845,83.9 415.845,83.011 U4.17
  Bottom Layer w0.4: U1.4 382.143,68.834 v1(385.572,68.834)
I5: U1.5 U4.18 | length 45.1
  Top Layer w0.4: v1@386.315,71.355 386.315,83.293 387.223,84.201 413.131,84.201 413.465,83.867 413.465,82.851 U4.18
  Bottom Layer w0.4: U1.5 382.124,71.355 386.315,71.355 v1(386.334,71.374)
I6: U1.6 U4.19 | length 37.6
  Top Layer w0.4: U1.6 383.052,73.787 383.286,74.021 v1(383.286,80.137)
  Bottom Layer w0.4: U1.6 U1.6@382.104,73.699 ; v1(383.286,80.137) 410.337,80.137 410.972,80.772 U4.19
I7: U1.7 U4.13 | length 41.1
  Top Layer w0.4: U1.7 U1.7@382.143,76.454
  Bottom Layer w0.4: U1.7 382.104,76.415 385.484,76.415 386.08,75.819 386.08,73.787 386.715,73.152 418.084,73.152 418.592,73.66 U4.13
I8: U1.8 U4.12 | length 36.9
  Top Layer w0.4: U4.12@415.925,75.057 U4.12
  Bottom Layer w0.4: U1.8 414.401,78.867 416.052,77.216 U4.12
NC1: J4.1 K2.NO | length 9.2
  Top Layer w2: K2.NO 363.031,31.695 J4.1
NC2: J3.1 K4.NO | length 9.1
  Top Layer w2: J3.1 410.368,111.465 K4.NO
NC3: J2.1 K6.NO | length 9.1
  Top Layer w2: J2.1 392.684,111.496 K6.NO
NC4: J1.1 K8.NO | length 9.2
  Top Layer w2: J1.1 374.935,111.338 K8.NO
NC5: J8.3 K7.NO | length 8.4
  Top Layer w2: J8.3 357.028,111.246 K7.NO
NC6: J7.3 K5.NO | length 8.4
  Top Layer w2: K5.NO 398.495,31.883 J7.3
NC7: J6.3 K3.NO | length 8.5
  Top Layer w2: K3.NO 345.155,31.837 J6.3
NC8: J5.3 K1.NO | length 8.5
  Top Layer w2: K1.NO 380.842,31.837 J5.3
NetDS1_1: DS1.1 R2.2 | length 4.1
  Top Layer w1: R2.2 DS1.1
NetDS2_1: DS2.1 R3.2 | length 4.1
  Top Layer w1: R3.2 DS2.1
NetDS3_1: DS3.1 R4.2 | length 3.9
  Top Layer w1: R4.2 DS3.1
NetDS4_1: DS4.1 R5.2 | length 4.1
  Top Layer w1: R5.2 DS4.1
NetDS5_1: DS5.1 R6.2 | length 4.3
  Top Layer w1: R6.2 DS5.1
NetDS6_1: DS6.1 R7.2 | length 4
  Top Layer w1: R7.2 DS6.1
NetDS7_1: DS7.1 R8.2 | length 4
  Top Layer w1: R8.2 DS7.1
NetDS8_1: DS8.1 R9.2 | length 4
  Top Layer w1: R9.2 DS8.1
NetP1_5: P1.5 U4.25 | length 92.4
  Top Layer w0.4: v1(422.148,84.201) 424.053,84.201 424.307,83.947 424.307,75.819
  Bottom Layer w0.4: U4.25 395.732,82.931 397.002,84.201 v1(422.148,84.201) ; P1.5 421.952,32.385 425.323,32.385 427.101,34.163 427.101,57.277 424.307,60.071 v1(424.307,75.565)
NetP1_6: P1.6 U4.26 | length 96.7
  Top Layer w0.4: v1(421.64,84.836) 424.434,84.836 425.196,84.074 425.196,75.819
  Bottom Layer w0.4: U4.26 393.192,82.931 395.097,84.836 v1(421.64,84.836) ; P1.6 417.501,33.836 418.411,33.836 420.497,31.75 425.831,31.75 427.863,33.782 427.863,57.658 425.069,60.452 v1(425.069,75.565)
NetP1_7: P1.7 U4.27 | length 101.1
  Top Layer w0.4: v1(421.132,85.471) 424.815,85.471 425.831,84.455 v1(425.831,75.565)
  Bottom Layer w0.4: U4.27 390.779,82.804 393.446,85.471 v1(421.132,85.471) ; P1.7 417.566,31.115 426.212,31.115 428.625,33.528 428.625,58.039 425.831,60.833 v1(425.831,75.565)
NetP1_8: P1.8 U4.28 | length 107.2
  Top Layer w0.4: v1(420.624,86.106) 425.196,86.106 426.593,84.709 v1(426.593,75.565)
  Bottom Layer w0.4: U4.28 388.366,82.804 391.668,86.106 v1(420.624,86.106) ; P1.8 417.608,28.157 418.174,28.157 420.497,30.48 426.593,30.48 429.387,33.274 429.387,58.42 426.593,61.214 v1(426.593,75.565)
NetP2_1: P2.1 U4.2 | length 75.5
  Top Layer w0.4: U4.2 395.224,79.756 v1(423.164,79.756) ; P2.1 423.053,115.019 423.137,114.935 v1(423.164,114.935)
  Bottom Layer w0.4: v1(423.164,79.756) v1(423.164,114.935)
NetP2_2: P2.2 U4.3 | length 71.6
  Top Layer w0.4: U4.3 397.062,79.054 v1(423.198,79.054) ; P2.2 417.288,112.016 423.797,112.016 v1(423.799,112.014)
  Bottom Layer w0.4: v1(423.198,79.054) 423.605,79.054 423.799,79.248 v1(423.799,112.014)
NetP2_3: P2.3 U4.4 | length 67.5
  Top Layer w0.4: U4.4 398.903,78.355 v1(423.215,78.355) ; P2.3 417.32,108.985 424.415,108.985 v1(424.434,108.966)
  Bottom Layer w0.4: v1(423.215,78.355) 423.922,78.355 424.434,78.867 v1(424.434,108.966)
NetP2_4: P2.4 U4.5 | length 63.6
  Top Layer w0.4: U4.5 400.721,77.633 v1(423.249,77.633) ; P2.4 417.368,105.937 425.05,105.937 v1(425.069,105.918)
  Bottom Layer w0.4: v1(423.249,77.633) 424.597,77.633 425.069,78.105 v1(425.069,105.918)
NetP2_5: P2.5 U4.6 | length 59.8
  Top Layer w0.4: U4.6 402.569,76.941 v1(423.258,76.941) ; P2.5 417.416,102.889 425.685,102.889 v1(425.704,102.87)
  Bottom Layer w0.4: v1(423.258,76.941) 425.302,76.941 425.704,77.343 v1(425.704,102.87)
NetP2_6: P2.6 U4.11 | length 48.4
  Top Layer w0.4: U4.11 413.512,73.787 413.893,73.406 421.386,73.406 423.291,75.311 v1(423.291,76.2) ; P2.6 417.337,99.968 426.32,99.968 v1(426.339,99.949)
  Bottom Layer w0.4: v1(423.291,76.2) 425.45,76.2 426.339,77.089 v1(426.339,99.949)
NO1: J4.3 K2.NC | length 9
  Top Layer w2: J4.3 375.031,31.125 K2.NC
NO2: J3.3 K4.NC | length 9
  Top Layer w2: K4.NC 398.368,111.719 J3.3
NO3: J2.3 K6.NC | length 9
  Top Layer w2: K6.NC 380.684,111.688 J2.3
NO4: J1.3 K8.NC | length 9
  Top Layer w2: K8.NC 362.935,111.846 J1.3
NO5: J8.1 K7.NC | length 8.6
  Top Layer w2: K7.NC 345.028,110.738 J8.1
NO6: J7.1 K5.NC | length 8.5
  Top Layer w2: J7.1 410.495,32.137 K5.NC
NO7: J6.1 K3.NC | length 8.6
  Top Layer w2: J6.1 357.155,32.091 K3.NC
NO8: J5.1 K1.NC | length 8.6
  Top Layer w2: J5.1 392.842,32.091 K1.NC
O1: DS5.2 K3.A2 U1.18 | length 40.9
  Top Layer w0.4: K3.A2 349.215,53.213 356.489,53.213 356.713,53.437 DS5.2 v1(358.902,54.737)
  Bottom Layer w0.4: v1(358.902,54.737) 360.553,56.388 376.047,56.388 376.444,56.785 376.444,59.039 U1.18
  Bottom Layer w0.6: K3.A2@344.932,49.376 K3.A2 345.186,49.184 K3.A2@345.186,49.376
O2: DS1.2 K2.A2 U1.17 | length 28.3
  Top Layer w0.4: K2.A2 367.087,53.213 374.259,53.213 374.493,53.447 DS1.2 374.62,54.61 v1(376.428,54.61)
  Bottom Layer w0.4: U1.17 378.079,59.944 378.079,55.372 377.317,54.61 v1(376.428,54.61)
  Bottom Layer w0.6: K2.A2@363.005,49.183 K2.A2
O3: DS8.2 K1.A2 U1.16 | length 43
  Top Layer w0.4: K1.A2 385.029,53.34 391.912,53.34 392.146,53.574 DS8.2 v1(394.081,54.737)
  Bottom Layer w0.4: U1.16 379.349,61.214 379.349,57.15 381.762,54.737 v1(394.081,54.737)
O4: DS7.2 K5.A2 U1.15 | length 59.3
  Top Layer w0.4: K5.A2 402.682,53.34 409.575,53.34 409.829,53.594 v1(409.829,56.134)
  Bottom Layer w0.4: U1.15 380.365,62.738 380.365,57.658 381.889,56.134 v1(409.829,56.134)
O5: DS3.2 K4.A2 U1.14 | length 57.1
  Top Layer w0.4: DS3.2 v1(411.607,88.265)
  Top Layer w0.6: DS3.2 410.104,88.697 410.104,93.585 K4.A2
  Bottom Layer w0.4: U1.14 380.492,77.343 380.492,85.217 382.016,86.741 401.828,86.741 403.352,88.265 v1(411.607,88.265)
  Bottom Layer w0.6: K4.A2 K4.A2@410.632,93.585
O6: DS6.2 K6.A2 U1.13 | length 38.6
  Top Layer w0.4: DS6.2@392.116,88.392 v1(393.954,88.392)
  Top Layer w0.6: DS6.2 392.116,88.392 392.42,88.696 392.42,93.581 K6.A2
  Bottom Layer w0.4: U1.13 379.222,78.613 379.222,87.503 380.111,88.392 v1(393.954,88.392)
  Bottom Layer w0.6: K6.A2 K6.A2@392.718,93.879
O7: DS2.2 K8.A2 U1.12 | length 22.4
  Top Layer w0.4: DS2.2@374.463,88.392 v1(376.428,88.392)
  Top Layer w0.6: DS2.2 374.463,88.392 374.671,88.6 374.671,93.585 K8.A2
  Bottom Layer w0.4: U1.12 378.079,80.01 378.079,87.376 377.063,88.392 v1(376.428,88.392)
O8: DS4.2 K7.A2 U1.11 | length 34.5
  Top Layer w0.4: DS4.2@356.743,88.265 v1(358.527,88.265)
  Top Layer w0.6: DS4.2@356.743,88.265 356.764,88.286 356.764,93.585 K7.A2
  Bottom Layer w0.4: v1(358.527,88.265) 359.918,88.265 361.569,86.614 375.666,86.614 376.809,85.471 376.809,81.28 U1.11
RST: R1.2 SW1.2 U4.1 | length 27.3
  Top Layer w0.5: U4.1 388.112,72.771 ; SW1.2 391.428,70.485 388.874,70.485 388.112,71.247 388.112,72.771 ; R1.2 401.331,71.363 399.923,72.771 388.112,72.771
XTAL1: C9.2 U4.9 Y1.1 | length 10.5
  Top Layer w0.5: C9.2 407.169,65.769 Y1.1 407.162,69.172 407.162,70.104 408.432,71.374 U4.9
XTAL2: C10.2 U4.10 Y1.2 | length 10.3
  Top Layer w0.5: U4.10 410.972,71.12 411.988,70.104 411.988,69.226 Y1.2 412.049,65.561 C10.2
pads on no net: J9.MH1 J9.MH2 P1.MH1 P1.MH2 P2.MH1 P2.MH2 SW1.1 SW1.4 U2.4 U3.4 U4.21 U4.23 U4.24
copper on no net:
  other v2: 337.185,27.305 426.466,27.305 337.185,115.951 426.466,115.951

## Polygon pours and split planes (outlines as drawn)
GND on Top Layer "Top Layer-No Net" (solid, pour order 0): 332.359,25.149 ccw(c335.026,25.022) 335.026,22.352 428.244,22.352 ccw(c428.371,25.016) 431.038,25.016 431.038,118.175 ccw(c428.436,118.175) 430.276,120.015 430.205,120.086 ccw(c428.537,118.418) 428.537,120.777 335.153,120.777 ccw(c335.026,118.11) 332.356,118.11 332.359,118.11

## Other copper
Top Layer:
  pour cut-out: 401.828,74.041 401.828,73.787 401.828,62.611 397.764,58.547 419.354,58.547 415.798,62.103 415.798,74.168 401.955,74.168 401.828,74.168

## Silkscreen, mask and mechanical layers (free items; w line width, h text height)
Top Overlay:
  drawing of 4428 lines, arcs and shapes, not listed
  text "NO" at 348.488,119.38 h1.2 r180
  text "COM" at 352.933,119.38 h1.2 r180
  text "NC" at 355.854,119.38 h1.2 r180
  text "NO" at 366.014,119.38 h1.2 r180
  text "COM" at 370.459,119.38 h1.2 r180
  text "NC" at 373.38,119.38 h1.2 r180
  text "NO" at 383.921,119.38 h1.2 r180
  text "COM" at 388.366,119.38 h1.2 r180
  text "NC" at 391.287,119.38 h1.2 r180
  text "NO" at 401.574,119.38 h1.2 r180
  text "COM" at 406.019,119.38 h1.2 r180
  text "NC" at 408.94,119.38 h1.2 r180
  text "RX" at 420.878,114.427 h1.2
  text "Designed by ANIL EFE for Open Source Hardware." at 427.728,111.76 h1.5 r270
  text "TX" at 420.878,111.379 h1.2
  text "Switching Limits" at 340.392,108.331 h2 r270
  text "PD2" at 420.878,108.331 h1.2
  text "PD3" at 420.878,105.283 h1.2
  text "220VAC" at 337.058,103.505 h2 r270
  text "300VDC" at 334.01,103.251 h2 r270
  text "PD4" at 420.878,102.362 h1.2
  text "PD5" at 420.878,99.314 h1.2
  text "GND" at 420.878,96.393 h1.2
  text "GND" at 420.878,93.472 h1.2
  text "INPUT 12V" at 336.773,59.213 h2.2 r270
  text "RESET" at 383.794,59.055 h1.5
  text "+5V" at 420.878,48.514 h1.2
  text "+5V" at 420.878,45.466 h1.2
  text "+3.3V" at 420.878,42.545 h1.2
  text "+3.3V" at 420.878,39.497 h1.2
  text "ADC2" at 420.878,36.322 h1.2
  text "ADC3" at 420.878,33.401 h1.2
  text "SDA" at 420.878,30.48 h1.2
  text "SCL" at 420.878,27.432 h1.2
  text "NC" at 346.456,23.495 h1.2
  text "COM" at 349.377,23.495 h1.2
  text "NO" at 353.822,23.495 h1.2
  text "NC" at 364.744,23.495 h1.2
  text "COM" at 367.665,23.495 h1.2
  text "NO" at 372.11,23.495 h1.2
  text "NC" at 382.27,23.495 h1.2
  text "COM" at 385.191,23.495 h1.2
  text "NO" at 389.636,23.495 h1.2
  text "NC" at 399.796,23.495 h1.2
  text "COM" at 402.717,23.495 h1.2
  text "NO" at 407.162,23.495 h1.2